# EAGLE board Analog_Light_Project_Schematic_v1 (EAGLE 9.2.2)
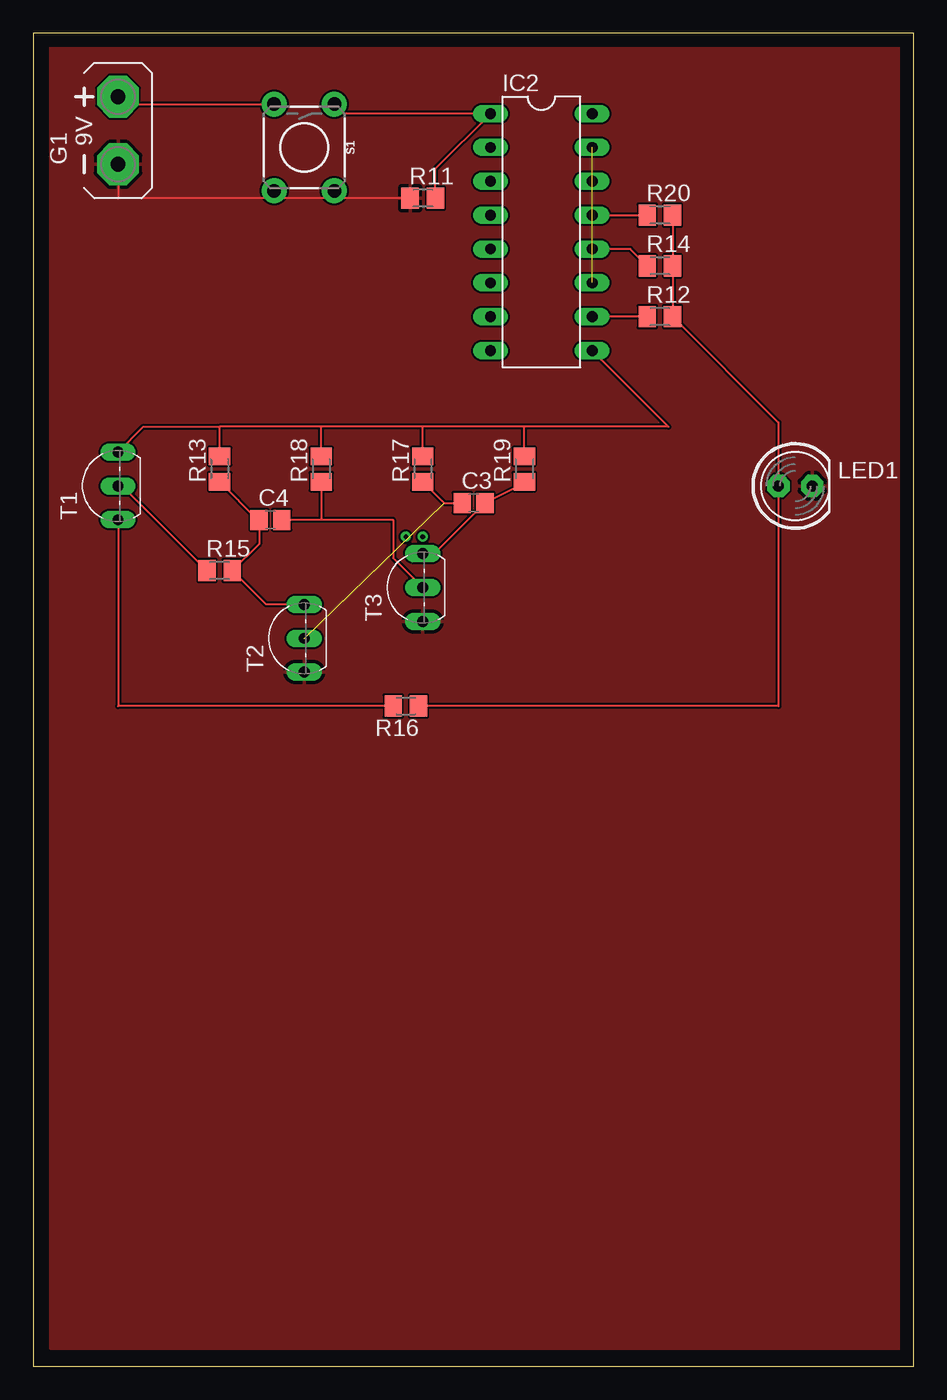
[diagram p0: board, top side]
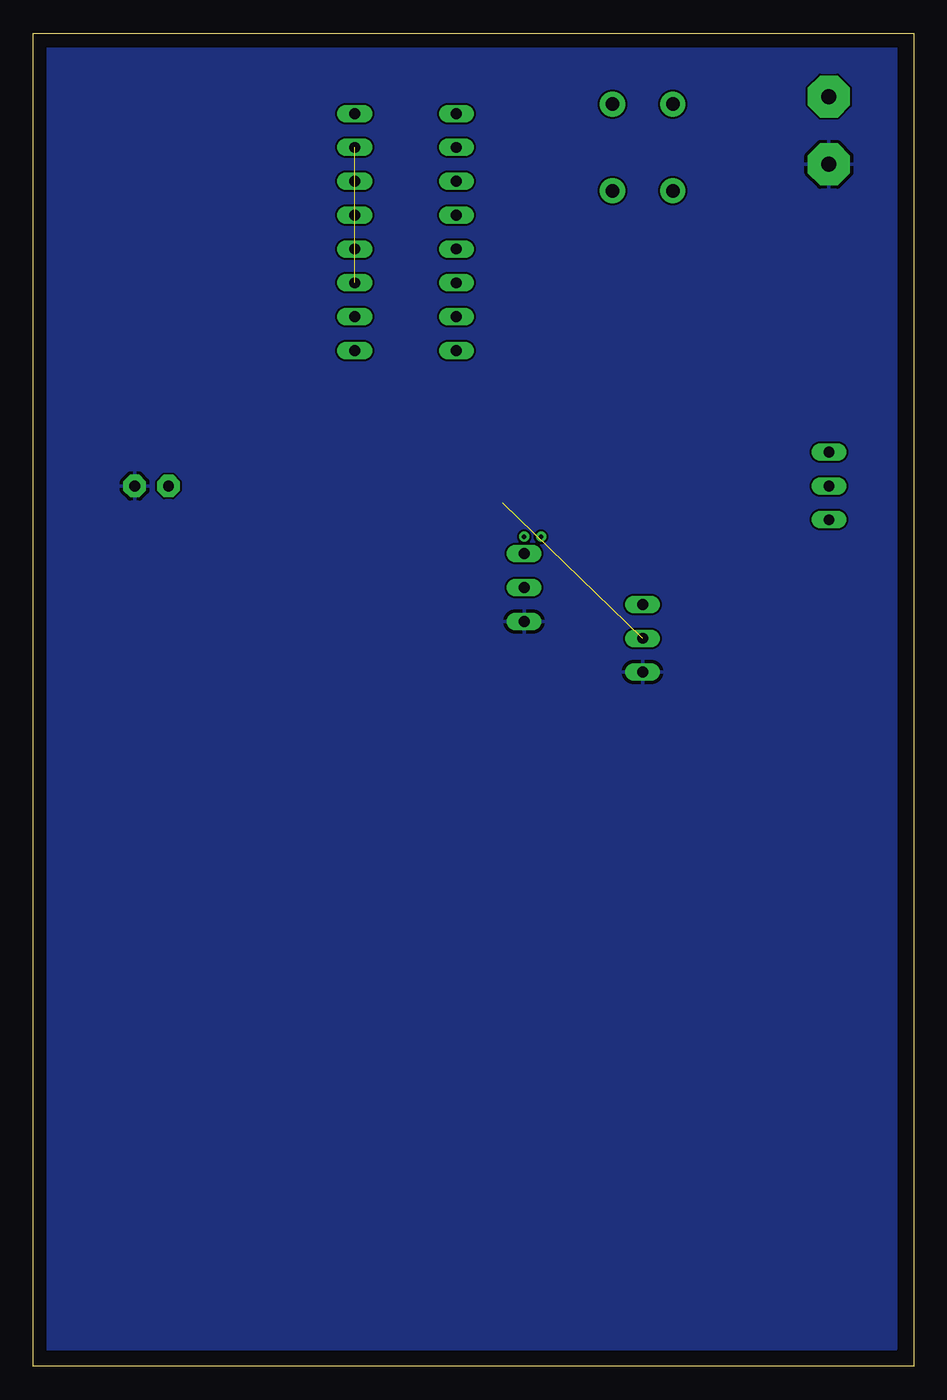
[diagram p1: board, bottom side, seen from below]

Size 66.02 x 100 mm. Coordinates in mm from the lower left corner, seen from the top.
Outline: 0,0 66.02,0 66.02,100 0,100 0,0
Copper layers (1*16): Top 0.035mm / dielectric 1.5mm / Bottom 0.035mm
Design rules "default": minimum track width 6mil, minimum drill 0.35mm, track to track 6mil, track to pad 6mil, pad to pad 6mil, via to via 6mil, smd to smd 6mil, copper to edge 40mil, drill to drill 6mil, minimum pad ring 10mil, minimum via ring 8mil, stop-mask expansion 4mil, vias tented up to drill 0mil, thermal gap 10mil

## Footprints (pad centres in the part's own frame; a part is rotated, then mirrored left to right if it is on the bottom)
C0805 = smd 1.3 x 1.5: 1 -0.85,0; 2 0.85,0
AB9V = drill 1.118 pad 3.15 octagon: + 0,2.54; - 0,-2.54
DIL16 = drill 0.813 long: 1 -8.89,-3.81; 2 -6.35,-3.81; 3 -3.81,-3.81; 4 -1.27,-3.81; 5 1.27,-3.81; 6 3.81,-3.81; 7 6.35,-3.81; 8 8.89,-3.81; 9 8.89,3.81; 10 6.35,3.81; 11 3.81,3.81; 12 1.27,3.81; 13 -1.27,3.81; 14 -3.81,3.81; 15 -6.35,3.81; 16 -8.89,3.81
LED5MM = drill 0.813 pad 1.676 octagon: A -1.27,0; K 1.27,0
M0805 = smd 1.3 x 1.6: 1 -0.95,0; 2 0.95,0
TACTILE_SWITCH_PTH_6.0MM_KIT = drill 1.016 pad 1.88: 1 -3.251,2.261; 2 3.251,2.261; 3 -3.251,-2.261; 4 3.251,-2.261
TO92-EBC-OVAL = drill 0.813 long: B 0,-1.27; C 2.54,-1.27; E -2.54,-1.27

## Placement (x,y rotation side)
C3  [C0805]  33.02,64.77 0 top
C4  [C0805]  17.78,63.5 0 top
G1  AB9V  [AB9V]  6.35,92.71 0 top
IC2  4026N  [DIL16]  38.1,85.09 270 top
LED1  [LED5MM]  57.15,66.04 0 top
R11  [M0805]  29.21,87.63 0 top
R12  [M0805]  46.99,78.74 0 top
R13  [M0805]  13.97,67.31 90 top
R14  [M0805]  46.99,82.55 0 top
R15  [M0805]  13.97,59.69 0 top
R16  [M0805]  27.94,49.53 180 top
R17  [M0805]  29.21,67.31 90 top
R18  [M0805]  21.59,67.31 90 top
R19  [M0805]  36.83,67.31 90 top
R20  [M0805]  46.99,86.36 0 top
S1  MOMENTARY-SWITCH-SPST-PTH-6.0MM-KIT  [TACTILE_SWITCH_PTH_6.0MM_KIT]  20.32,91.44 270 top
T1  2N2222  [TO92-EBC-OVAL]  5.08,66.04 90 top
T2  2N2222  [TO92-EBC-OVAL]  19.05,54.61 90 top
T3  2N2222  [TO92-EBC-OVAL]  27.94,58.42 90 top

## Library data of the parts
C3 C4 LED1 R11-R20 T1-T3 = adafruit
G1 = battery
IC2 = 40xx
S1 = SparkFun-Switches; PROD_ID: SWCH-08441; SF_SKU: COM-00097

## Nets
GND: G1.- LED1.K R11.1 T2.E T3.E
N$1: IC2.9 R13.2 R17.2 R18.2 R19.2 T1.C
N$2: C4.1 R13.1 R15.2 T2.C
N$3: C4.2 R18.1 T3.B
N$4: C3.1 R17.1 T2.B
N$5: C3.2 R19.1 T3.C
N$7: R15.1 T1.B
N$8: R16.2 T1.E
N$9: LED1.A R12.2 R14.2 R16.1 R20.2
N$10: IC2.10 R12.1
N$11: IC2.12 R14.1
N$12: IC2.13 R20.1
N$13: IC2.11 IC2.15
N$14: G1.+ S1.3
N$15: IC2.1 R11.2 S1.1
VDD: IC2.16
VSS: IC2.8

## Tracks (layer width: path | path; a pad name or v marks a point on that pad's centre or on a via)
GND
  Top 0.152: G1.- 6.35,87.63 R11.1
  pour Bottom: 1.27,99.06 158.75,99.06 158.75,1.27 1.27,1.27
  pour Top: 1.27,99.06 158.75,99.06 158.75,1.27 1.27,1.27
N$1
  Top 0.152: IC2.9 47.62,70.48 36.83,70.48 | T1.C 8.26,70.48 13.97,70.48 | 36.83,70.48 29.21,70.48 | 29.21,70.48 21.59,70.48 | 21.59,70.48 13.97,70.48 | R18.2 21.59,70.48 | R13.2 13.97,70.48 | R17.2 29.21,70.48 | R19.2 36.83,70.48
N$2
  Top 0.152: T2.C 17.46,57.15 R15.2 16.93,61.7 C4.1 16.83,63.5 R13.1
N$3
  Top 0.152: T3.B 26.99,60.64 26.99,63.5 21.59,63.5 | 21.59,63.5 C4.2 | R18.1 21.59,63.5
N$4  (1 unrouted)
  Top 0.152: R17.1 30.64,64.93 30.8,64.77 C3.1
N$5
  Top 0.152: R19.1 36.7,66.18 C3.2 30.06,60.96 T3.C
N$6  (via drill 0.35)
  other vias: 27.94,62.23
N$7
  Top 0.152: R15.1 6.67,66.04 T1.B
N$8
  Top 0.152: T1.E 6.35,49.53 R16.2
N$9
  Top 0.152: R20.2 R14.2 R12.2 55.88,70.8 LED1.A 55.88,49.53 R16.1
N$10
  Top 0.152: R12.1 IC2.10
N$11
  Top 0.152: R14.1 44.77,83.82 IC2.12
N$12
  Top 0.152: IC2.13 R20.1
N$13  (1 unrouted)
N$14
  Top 0.152: G1.+ 6.91,94.69 S1.3
N$15
  Top 0.152: R11.2 30.16,89.85 IC2.1 23.29,93.98 S1.1
N$16  (via drill 0.35)
  other vias: 29.21,62.23